# EAGLE board PIC32DIP (EAGLE 5.07)
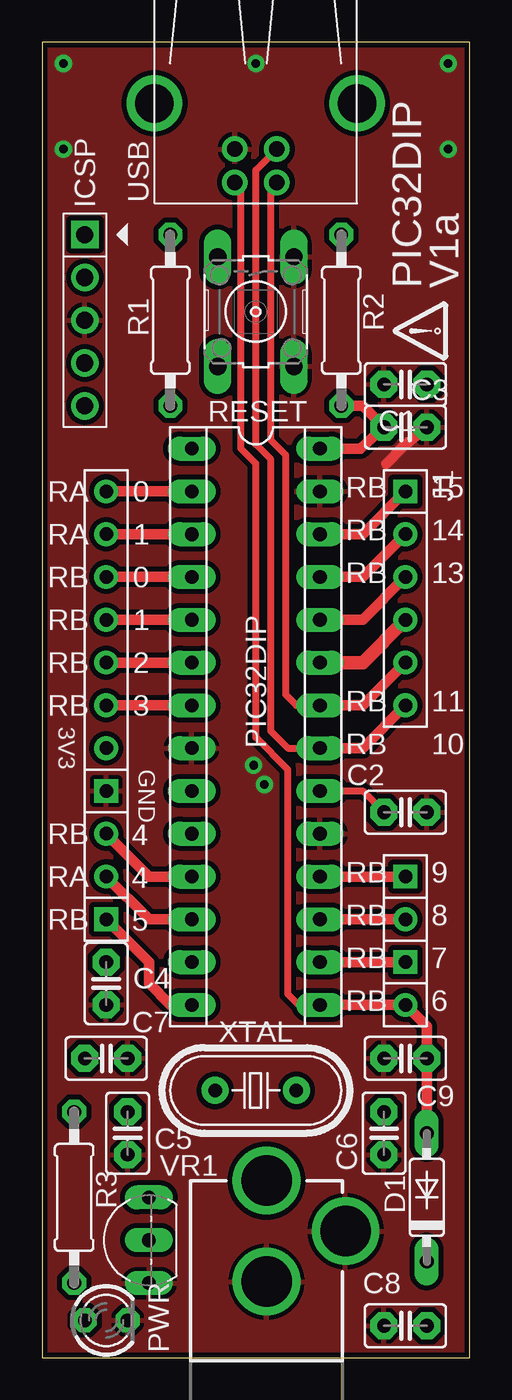
[diagram p0: board, top side]
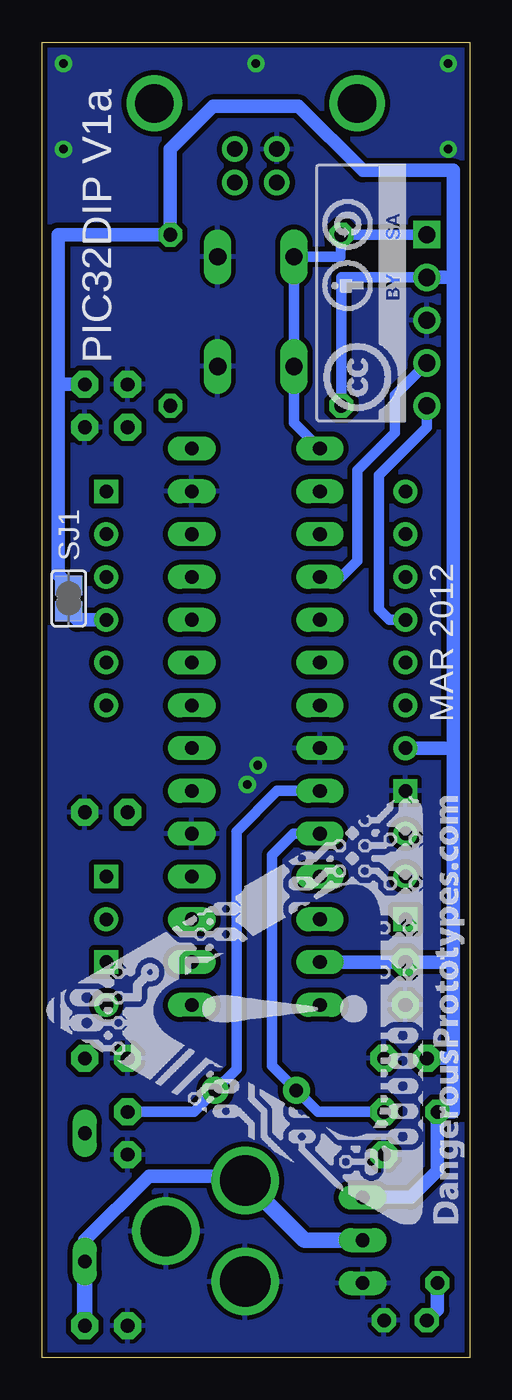
[diagram p1: board, bottom side, seen from below]

Size 25.4 x 78.1 mm. Coordinates in mm from the lower left corner, seen from the top.
Outline: 0,0 25.4,0 25.4,78.1 0,78.1 0,0
Copper layers (1*16): Top 0.035mm / dielectric 1.5mm / Bottom 0.035mm
Design rules "SparkFun": minimum track width 8mil, minimum drill 20mil, track to track 8mil, track to pad 8mil, pad to pad 8mil, via to via 8mil, smd to smd 8mil, copper to edge 10mil, drill to drill 8mil, minimum pad ring 12mil, minimum via ring 10mil, stop-mask expansion 4mil, vias tented up to drill 25mil, thermal gap 10mil

## Footprints (pad centres in the part's own frame; a part is rotated, then mirrored left to right if it is on the bottom)
DEC = drill 0.813 pad 1.6 octagon: 1 -1.27,0; 2 1.27,0
DO35-7 = drill 0.813 long: A 3.81,0; C -3.81,0
HEADER_PRG_1X05_ICSP_B = drill 1.016 square: 1 -5.08,0 | drill 1.016 round: 2 -2.54,0; 3 0,0; 4 2.54,0; 5 5.08,0
M1X6 = drill 0.8 square: 1 0,0 | drill 0.8 round: 2 2.54,0; 3 5.08,0; 4 7.62,0; 5 10.16,0; 6 12.7,0
M1X3 = drill 0.8 square: 1 0,0 | drill 0.8 round: 2 2.54,0; 3 5.08,0
M1X8 = drill 0.8 square: 1 -8.89,0 | drill 0.8 round: 2 -6.35,0; 3 -3.81,0; 4 -1.27,0; 5 1.27,0; 6 3.81,0; 7 6.35,0; 8 8.89,0
M1X2 = drill 0.8 square: 1 -1.27,0 | drill 0.8 round: 2 1.27,0
LED-3MM = drill 0.813 octagon: A -1.27,0; K 1.27,0
RTH025W = drill 0.813 octagon: 1 -5.08,0; 2 5.08,0
B3F-10XX = drill 1.016 long: 1 -3.251,2.261; 2 3.251,2.261; 3 -3.251,-2.261; 4 3.251,-2.261
SJ = smd 1.168 x 1.6: 1 -0.762,0; 2 0.762,0
SOCKET-28-3 = drill 0.813 long: 1 -16.51,-3.81; 2 -13.97,-3.81; 3 -11.43,-3.81; 4 -8.89,-3.81; 5 -6.35,-3.81; 6 -3.81,-3.81; 7 -1.27,-3.81; 8 1.27,-3.81; 9 3.81,-3.81; 10 6.35,-3.81; 11 8.89,-3.81; 12 11.43,-3.81; 13 13.97,-3.81; 14 16.51,-3.81; 15 16.51,3.81; 16 13.97,3.81; 17 11.43,3.81; 18 8.89,3.81; 19 6.35,3.81; 20 3.81,3.81; 21 1.27,3.81; 22 -1.27,3.81; 23 -3.81,3.81; 24 -6.35,3.81; 25 -8.89,3.81; 26 -11.43,3.81; 27 -13.97,3.81; 28 -16.51,3.81
POWER_JACK_PTH = drill 2.997 round: GND 0,7.7; GND@1 4.7,10.7; PWR 0,13.7
USB-B-H = drill 0.914 round: D+ 0,1.25; D- 1.981,1.25; GND 0,-1.25; VBUS 1.981,-1.25 | drill 2.286 round: GND@1 -2.718,6.02; GND@2 -2.718,-6.02
TO92-EBC = drill 0.813 long: B 0,-1.27; C 2.54,-1.27; E -2.54,-1.27
HC49U70 = drill 0.8 pad 1.6 round: 1 -2.413,0; 2 2.413,0

## Placement (x,y rotation side)
C1  0.1u  [DEC]  21.59,57.79 180 top
C2  10u  [DEC]  21.59,32.39 0 top
C3  0.1u  [DEC]  21.59,55.25 0 top
C4  0.1u  [DEC]  3.81,22.22 270 top
C5  27pf  [DEC]  5.08,13.34 270 top
C6  27pf  [DEC]  20.32,13.34 270 top
C7  1u  [DEC]  3.81,17.78 0 top
C8  1u  [DEC]  21.59,1.91 180 top
C9  0.1u  [DEC]  21.59,17.78 180 top
D1  1N4148DO35-7  [DO35-7]  22.86,9.53 90 top
ICSP  HEADER_PRG_PIC_ICSPB  [HEADER_PRG_1X05_ICSP_B]  2.54,61.59 270 top
J1  CON_HEADER_1X06-PTH  [M1X6]  21.59,51.44 270 top
J2  CON_HEADER_1X03-PTH  [M1X3]  3.81,26.04 90 top
J5  CON_HEADER_1X08-PTH  [M1X8]  3.81,42.55 90 top
J6  CON_HEADER_1X02-PTH  [M1X2]  21.59,27.3 270 top
J7  CON_HEADER_1X02-PTH  [M1X2]  21.59,22.22 270 top
PWR  [LED-3MM]  3.81,2.22 0 top
R1  [RTH025W]  7.62,61.59 270 top
R2  [RTH025W]  17.78,61.59 270 top
R3  [RTH025W]  1.91,9.53 270 top
RESET  [B3F-10XX]  12.7,62.1 270 top
SJ1  [SJ]  23.81,45.09 90 bottom
U$1  PIC32DIP  [SOCKET-28-3]  12.7,37.47 270 top
U$2  DINA4_L  [DP_LOGO]  23.5,60.96 90 top
U$3  POWER_JACKPTH  [POWER_JACK_PTH]  13.34,-3.17 0 top
U$4  [DP_LOGO_ART_1X1]  0.32,7.94 90 bottom
U$5  [CC-BY-SA]  3.81,55.56 90 bottom
USB  USB  [USB-B-H]  12.7,71.75 270 top
VR1  MCP1701-3.3  [TO92-EBC]  5.08,6.99 90 top
XTAL  20Mhz  [HC49U70]  12.7,15.88 0 top

## Library data of the parts
C1-C9 J1 J2 J5-J7 PWR R1-R3 U$4 U$5 = dp_devices
D1 = diode
ICSP = DP2
RESET = switch-omron; MPN: B3F-1000; OC_FARNELL: 176432; OC_NEWARK: 36M3542
SJ1 = jumper
U$1 VR1 = fica2
U$2 = DP2; LICENSE: CC-BY-SA; PROJECT: PIC32DIP; URL1: http://; URL2: DangerousPrototypes.com
U$3 = SparkFun-3-2-07
USB = con-usb-2
XTAL = crystal

## Nets
+3V3: C1.1 C4.1 C7.1 ICSP.2 J5.2 R1.2 R2.1 R3.1 SJ1.2 U$1.13 VR1.C
AVDD: C3.1 R2.2 U$1.28
D+: J1.6 U$1.21 USB.D+
D-: J1.5 U$1.22 USB.D-
DC_IN: C8.1 D1.C U$3.PWR VR1.B
GND: C1.2 C2.2 C3.2 C4.2 C5.2 C6.2 C7.2 C8.2 C9.2 ICSP.3 J5.1 PWR.K RESET.1 RESET.2 U$1.8 U$1.19 U$1.27 U$3.GND U$3.GND@1 USB.GND VR1.E
N$1: J5.8 U$1.2
N$2: J5.7 U$1.3
N$3: J5.4 U$1.6
N$4: J5.3 U$1.7
N$5: J2.3 U$1.11
N$6: PWR.A R3.2
N$7: J2.2 U$1.12
N$8: J2.1 U$1.14
N$9: J7.1 U$1.16
N$10: J6.2 U$1.17
N$11: J6.1 U$1.18
N$12: J1.1 U$1.26
N$13: J1.2 U$1.25
N$14: J1.3 U$1.24
N$15: J1.4 SJ1.1 U$1.23
OSC1: C6.1 U$1.9 XTAL.2
OSC2: C5.1 U$1.10 XTAL.1
PGEC: ICSP.5 J5.5 U$1.5
PGED: ICSP.4 J5.6 U$1.4
VBUS: C9.1 D1.A J7.2 U$1.15 USB.VBUS
VCAP: C2.1 U$1.20
~MCLR: ICSP.1 R1.1 RESET.3 RESET.4 U$1.1

## Tracks (layer width: path | path; a pad name or v marks a point on that pad's centre or on a via)
+3V3
  Bottom 0.61: R1.2 7.62,64.13 ICSP.2
  Bottom 0.813: 0.95,23.49 C4.1 U$1.13 | 0.95,23.49 0.95,36.2 | 0.95,36.2 J5.2 | 0.95,36.2 0.95,64.13 | 0.95,64.13 ICSP.2 | 24.45,57.79 24.45,66.67 R2.1 17.78,71.75 15.24,74.3 10.16,74.3 6.35,70.48 0.95,70.48 0.95,64.13 | VR1.C 3.49,9.53 1.91,11.11 R3.1 0.95,14.61 0.95,17.78 | 0.95,17.78 0.95,23.49 | 0.95,17.78 C7.1 | 24.45,57.79 C1.1 | 24.45,57.79 24.45,46.48 SJ1.2
AVDD
  Top 0.61: U$1.28 18.92,53.98 C3.1 19.05,56.52 R2.2
D+
  Top 0.406: U$1.21 14.61,36.2 13.59,37.21 13.59,53.34 12.7,54.23 12.7,70.5 USB.D+
  Top 0.61: U$1.21 19.05,36.2 J1.6
D-
  Top 0.406: U$1.22 15.11,38.73 14.48,39.37 14.48,53.59 13.59,54.48 13.59,69.41 USB.D-
  Top 0.61: U$1.22 19.05,38.73 J1.5
DC_IN
  Bottom 0.813: 13.61,10.79 19.05,10.79 22.86,6.99 D1.C
  Bottom 0.914: 13.61,10.79 U$3.PWR 9.79,6.99 VR1.B | D1.C C8.1
GND  (via drill 0.51)
  Top 0.61: C3.2 21.46,54.1 20.45,53.09
  other vias: 12.57,35.18 13.21,34.04 24.13,76.83 1.27,76.83 1.27,71.75 12.7,76.83 24.13,71.75
  pour Top (isolate 0.305): 0,78.1 25.4,78.1 25.4,0 0,0
  pour Bottom (isolate 0.305): 0,78.1 25.4,78.1 25.4,0 0,0
N$1
  Top 0.61: J5.8 U$1.2
N$2
  Top 0.61: J5.7 U$1.3
N$3
  Top 0.61: J5.4 U$1.6
N$4
  Top 0.61: J5.3 U$1.7
N$5
  Top 0.61: U$1.11 6.35,28.57 J2.3
N$6
  Bottom 0.813: R3.2 1.91,2.86 PWR.A
N$7
  Top 0.61: U$1.12 6.35,26.04 J2.2
N$8
  Top 0.61: J2.1 6.35,23.49 6.35,22.22 7.62,20.95 U$1.14
N$9
  Top 0.61: U$1.16 J7.1
N$10
  Top 0.61: U$1.17 J6.2
N$11
  Top 0.61: U$1.18 J6.1
N$12
  Top 0.61: U$1.26 19.05,48.9 J1.1
N$13
  Top 0.61: U$1.25 19.05,46.36 J1.2
N$14
  Top 0.61: U$1.24 19.05,43.82 J1.3
N$15
  Top 0.813: U$1.23 19.05,41.27 J1.4
  Bottom 0.813: J1.4 23.3,43.82 SJ1.1
OSC1
  Bottom 0.61: U$1.9 11.43,33.66 13.84,31.24 13.84,17.14 XTAL.2 16.38,14.61 C6.1
OSC2
  Bottom 0.61: U$1.10 10.48,31.11 11.75,29.84 11.75,17.34 XTAL.1 9.02,14.61 C5.1
PGEC
  Top 0.61: J5.5 U$1.5
  Bottom 0.61: ICSP.5 2.54,55.25 5.4,52.39 5.4,44.45 4.76,43.82 J5.5
PGED
  Top 0.61: J5.6 U$1.4
  Bottom 0.61: ICSP.4 4.45,57.15 4.45,54.93 6.67,52.71 6.67,47.31 7.62,46.36 U$1.4
VBUS
  Top 0.406: U$1.15 15.24,20.95 14.61,21.59 14.61,34.93 12.7,36.83 12.7,53.09 11.81,53.98 11.81,69.41 USB.VBUS
  Top 0.61: D1.A C9.1 22.86,19.68 J7.2 U$1.15
VCAP
  Top 0.406: U$1.20 19.05,33.66 C2.1
~MCLR
  Bottom 0.61: ICSP.1 R1.1 7.67,65.35 RESET.3 RESET.4 10.44,55.52 U$1.1

## Text on the board
tNames: PIC32DIP | V1a | RB | 15 | RA | 0 | RA | 1 | RB | 14 | RB | 13 | RB | 0 | RB | 1 | RB | 2 | RB | 3 | RB | 11 | 3V3 | PIC32DIP | GND | RB | 10 | RB | 4 | RA | 4 | RB | 9 | RB | 5 | RB | 8 | RB | 7 | RB | 6 | VR1
bNames: PIC32DIP V1a | MAR 2012
Reference: !MLCR | 3V3 | GND | ICSP | PGD | PGC | RA0 | RB15 | RA1 | RB14 | RB0 | RB13 | RB1 | RB2 | RB3 | RB11 | 3V3 | RB10 | GND | RB4 | RA4 | RB9 | RB5 | RB8 | RB7 | RB6/VBUS